# EAGLE board copro (EAGLE 8.3.1)

Size 101.6 x 114.3 mm. Coordinates in mm from the lower left corner, seen from the top.
Outline: 14,12.7 87.6,12.7 87.6,20.5 101.6,20.5 101.6,114.3 0,114.3 0,20.5 14,20.5 14,12.7
Copper layers (1*16): Top 0.035mm / dielectric 1.5mm / Bottom 0.035mm
Design rules "battery_balancer": minimum track width 6mil, minimum drill 0.35mm, track to track 0.205mm, track to pad 0.205mm, pad to pad 0.205mm, via to via 0.205mm, smd to smd 6mil, copper to edge 40mil, drill to drill 6mil, minimum pad ring 10mil, minimum via ring 8mil, stop-mask expansion 4mil, vias tented up to drill 0mil, thermal gap 10mil
Holes 3.26 mm at 3.17,111.12 98.42,111.12

## Footprints (pad centres in the part's own frame; a part is rotated, then mirrored left to right if it is on the bottom)
1X03 = drill 1.016 pad 1.88: 1 0,0; 2 2.54,0; 3 5.08,0
0603 = smd 1.1 x 1: 1 -0.85,0; 2 0.85,0
QFP50P1200X1200X160-64N = smd 1.45 x 0.3: 1 -5.75,3.75; 2 -5.75,3.25; 3 -5.75,2.75; 4 -5.75,2.25; 5 -5.75,1.75; 6 -5.75,1.25; 7 -5.75,0.75; 8 -5.75,0.25; 9 -5.75,-0.25; 10 -5.75,-0.75; 11 -5.75,-1.25; 12 -5.75,-1.75; 13 -5.75,-2.25; 14 -5.75,-2.75; 15 -5.75,-3.25; 16 -5.75,-3.75; 33 5.75,-3.75; 34 5.75,-3.25; 35 5.75,-2.75; 36 5.75,-2.25; 37 5.75,-1.75; 38 5.75,-1.25; 39 5.75,-0.75; 40 5.75,-0.25; 41 5.75,0.25; 42 5.75,0.75; 43 5.75,1.25; 44 5.75,1.75; 45 5.75,2.25; 46 5.75,2.75; 47 5.75,3.25; 48 5.75,3.75 | smd 0.3 x 1.45: 17 -3.75,-5.75; 18 -3.25,-5.75; 19 -2.75,-5.75; 20 -2.25,-5.75; 21 -1.75,-5.75; 22 -1.25,-5.75; 23 -0.75,-5.75; 24 -0.25,-5.75; 25 0.25,-5.75; 26 0.75,-5.75; 27 1.25,-5.75; 28 1.75,-5.75; 29 2.25,-5.75; 30 2.75,-5.75; 31 3.25,-5.75; 32 3.75,-5.75; 49 3.75,5.75; 50 3.25,5.75; 51 2.75,5.75; 52 2.25,5.75; 53 1.75,5.75; 54 1.25,5.75; 55 0.75,5.75; 56 0.25,5.75; 57 -0.25,5.75; 58 -0.75,5.75; 59 -1.25,5.75; 60 -1.75,5.75; 61 -2.25,5.75; 62 -2.75,5.75; 63 -3.25,5.75; 64 -3.75,5.75
USB-MINIB = smd 2.5 x 0.5: D+ 2.5,0; D- 2.5,0.8; GND 2.5,-1.6; ID 2.5,-0.8; VBUS 2.5,1.6 | smd 2.5 x 2: S1 -3,4.5; S2 2.5,4.5; S3 -3,-4.5; S4 2.5,-4.5 | hole 0.9: 0,2.2; 0,-2.2
CUI_PJ-002AH-SMT-TR = smd 1.5 x 2.4: 1.1 -3.05,5.7; 1.2 3.05,5.7; 2 -3.05,-5.7; 3 3.05,-5.7 | hole 1.6: -3.05,0 | hole 1.8: 1.45,0
SHDR20W81P254_2X10_3300X840X93 = drill 1 pad 1.5 square: 1 0,0 | drill 1 pad 1.5: 2 0,2.54; 3 2.54,0; 4 2.54,2.54; 5 5.08,0; 6 5.08,2.54; 7 7.62,0; 8 7.62,2.54; 9 10.16,0; 10 10.16,2.54; 11 12.7,0; 12 12.7,2.54; 13 15.24,0; 14 15.24,2.54; 15 17.78,0; 16 17.78,2.54; 17 20.32,0; 18 20.32,2.54; 19 22.86,0; 20 22.86,2.54
DIL04 = drill 0.813 offset: 1 -1.27,-3.81; 2 1.27,-3.81; 3 1.27,3.81; 4 -1.27,3.81
MOLEX_503500-0991 = smd 1.2 x 1.95: 1 -6.249,0; 2 -3.749,0; 3 -1.249,0; 4 1.251,0; 5 3.751,0; 6 6.251,0; 7 7.751,0; 8 9.251,0; 9 -8.749,0 | smd 1.5 x 1.1: DS1 14.094,-7.208 | smd 1.6 x 1.87: DS2 8.223,-15.258 | smd 2.1 x 1.55: PAD1 -11.274,11.176; PAD2 12.525,11.177 | smd 2.1 x 3.2: PAD3 -11.275,8.301; PAD4 12.525,8.301 | smd 1.55 x 2.2: PAD5 -13.729,3.625 | smd 1.55 x 4.17: PAD6 -13.68,-14.113 | smd 1.5 x 1.65: PAD7 14.094,-15.373 | smd 1 x 2: WP1 12.246,4.165; WP2 13.346,4.165
39-30-?02? = drill 1.422 pad 2.54 square: 1 0,0 | drill 1.422 pad 2.54 octagon: 2 0,5.512 | hole 3: 0,-7.3
TO18 = drill 0.813 octagon: 1 -1.27,-1.27; 2 1.27,-1.27; 3 1.27,1.27
5530843-6-BOARDFINGERS = smd 1.651 x 6.35 bottom: 3.3V_4 0.826,3.175; 3.3V_5 3.365,3.175; 3.3V_6 5.905,3.175; EXTRA1 16.066,3.175; EXTRA2 18.605,3.175; EXTRA3 21.145,3.175; EXTRA4 23.686,3.175; EXTRA5 26.226,3.175; EXTRA6 28.765,3.175; EXTRA7 31.305,3.175; EXTRA8 33.846,3.175; EXTRA9 36.386,3.175; EXTRA10 38.925,3.175; EXTRA11 41.465,3.175; EXTRA12 44.005,3.175; EXTRA13 46.545,3.175; EXTRA14 49.086,3.175; EXTRA15 51.626,3.175; EXTRA16 54.166,3.175; EXTRA17 56.706,3.175; EXTRA18 59.245,3.175; EXTRA19 61.785,3.175; EXTRA20 64.326,3.175; EXTRA21 66.865,3.175; EXTRA22 69.406,3.175; GND_4 8.445,3.175; GND_5 10.986,3.175; GND_6 13.525,3.175 | smd 1.651 x 6.35: 3.3VP1 0.826,3.175; 3.3VP2 3.365,3.175; 3.3VP3 5.905,3.175; CAN_H 51.626,3.175; CAN_L 54.166,3.175; EXTRA23 16.066,3.175; EXTRA24 18.605,3.175; EXTRA25 21.145,3.175; EXTRA26 23.686,3.175; EXTRA27 26.226,3.175; EXTRA28 28.765,3.175; EXTRA29 31.305,3.175; EXTRA30 33.846,3.175; EXTRA31 36.386,3.175; EXTRA32 38.925,3.175; EXTRA33 41.465,3.175; EXTRA34 44.005,3.175; EXTRA35 46.545,3.175; GND1 8.445,3.175; GND2 10.986,3.175; GND3 13.525,3.175; KILL_SWITCH 49.086,3.175; SCL_DEPTH 59.245,3.175; SCL_ESC 69.406,3.175; SCL_SENSOR 64.326,3.175; SDA_DEPTH 56.706,3.175; SDA_ESC 66.865,3.175; SDA_SENSOR 61.785,3.175
DF13-4P-1.25DSA = drill 0.6 pad 1.016 square: P$1 1.875,0 | drill 0.6 pad 1.016: P$2 0.625,0; P$3 -0.625,0; P$4 -1.875,0

## Placement (x,y rotation side)
455-1750-1-ND  [1X03]  -92.08,-26.99 0 top  (outside the outline)
455-1750-1-ND1  [1X03]  -92.08,-277.81 0 top  (outside the outline)
455-1750-1-ND2  [1X03]  -92.08,-339.73 0 top  (outside the outline)
455-1750-1-ND3  [1X03]  -92.08,-401.64 0 top  (outside the outline)
455-1750-1-ND4  [1X03]  -92.08,-463.55 0 top  (outside the outline)
455-1750-1-ND5  [1X03]  -92.08,-525.46 0 top  (outside the outline)
455-1750-1-ND6  [1X03]  -92.08,-587.38 0 top  (outside the outline)
455-1750-1-ND7  [1X03]  -92.08,-649.29 0 top  (outside the outline)
455-1750-1-ND8  [1X03]  -92.08,-711.2 0 top  (outside the outline)
455-1750-1-ND9  [1X03]  -92.08,-773.11 0 top  (outside the outline)
C1  4.7uF  [0603]  -98.42,-176.21 0 top  (outside the outline)
C2  100nF  [0603]  -98.42,-157.16 0 top  (outside the outline)
C3  2.2uF  [0603]  -98.42,-138.11 0 top  (outside the outline)
C4  100nF  [0603]  -98.42,-142.88 0 top  (outside the outline)
C6  100nF  [0603]  -98.42,-76.2 0 top  (outside the outline)
C8  2.2uF  [0603]  -98.42,-104.77 0 top  (outside the outline)
C9  100nF  [0603]  -98.42,-109.54 0 top  (outside the outline)
C12  100nF  [0603]  -98.42,-171.45 0 top  (outside the outline)
C14  1uF  [0603]  -98.42,-133.35 0 top  (outside the outline)
IC1  STM32F405RGT6  [QFP50P1200X1200X160-64N]  -93.66,-47.62 0 top  (outside the outline)
J1  USB_MINI-B_SMT  [USB-MINIB]  -7.94,3.17 0 top  (outside the outline)
J2  PJ-002AH-SMT-TR  [CUI_PJ-002AH-SMT-TR]  -19.05,-4.76 0 top  (outside the outline)
J4  30320-6002HB  [SHDR20W81P254_2X10_3300X840X93]  60.33,46.04 0 top
OK1  SFH610  [DIL04]  -33.34,-4.76 0 top  (outside the outline)
OK2  SFH610  [DIL04]  -93.66,-257.18 0 top  (outside the outline)
OK3  SFH610  [DIL04]  -93.66,-319.09 0 top  (outside the outline)
OK4  SFH610  [DIL04]  -93.66,-381 0 top  (outside the outline)
OK5  SFH610  [DIL04]  -93.66,-442.91 0 top  (outside the outline)
OK6  SFH610  [DIL04]  -93.66,-504.82 0 top  (outside the outline)
OK7  SFH610  [DIL04]  -93.66,-566.74 0 top  (outside the outline)
OK8  SFH610  [DIL04]  -93.66,-628.65 0 top  (outside the outline)
OK9  SFH610  [DIL04]  -93.66,-690.56 0 top  (outside the outline)
OK10  SFH610  [DIL04]  -93.66,-752.47 0 top  (outside the outline)
P1  503500-0991  [MOLEX_503500-0991]  -58.74,4.76 0 top  (outside the outline)
P2  39-30-02?  [39-30-?02?]  -88.9,-1.59 0 top  (outside the outline)
R1  10k  [0603]  -80.96,-288.93 0 top  (outside the outline)
R2  10k  [0603]  -98.42,-244.48 0 top  (outside the outline)
R3  10k  [0603]  -98.42,-195.26 0 top  (outside the outline)
R4  1k  [0603]  -98.42,-214.31 0 top  (outside the outline)
R5  220  [0603]  -98.42,-239.71 0 top  (outside the outline)
R6  1k  [0603]  -74.61,-288.93 0 top  (outside the outline)
R7  220  [0603]  -98.42,-306.39 0 top  (outside the outline)
R8  10k  [0603]  -92.08,-306.39 0 top  (outside the outline)
R9  10k  [0603]  -80.96,-350.84 0 top  (outside the outline)
R10  1k  [0603]  -74.61,-350.84 0 top  (outside the outline)
R11  220  [0603]  -98.42,-368.3 0 top  (outside the outline)
R12  10k  [0603]  -92.08,-368.3 0 top  (outside the outline)
R13  10k  [0603]  -80.96,-412.75 0 top  (outside the outline)
R14  1k  [0603]  -74.61,-412.75 0 top  (outside the outline)
R15  220  [0603]  -98.42,-430.21 0 top  (outside the outline)
R16  10k  [0603]  -92.08,-430.21 0 top  (outside the outline)
R17  10k  [0603]  -80.96,-474.66 0 top  (outside the outline)
R18  1k  [0603]  -74.61,-474.66 0 top  (outside the outline)
R19  220  [0603]  -98.42,-492.12 0 top  (outside the outline)
R20  10k  [0603]  -92.08,-492.12 0 top  (outside the outline)
R21  10k  [0603]  -80.96,-536.57 0 top  (outside the outline)
R22  1k  [0603]  -74.61,-536.57 0 top  (outside the outline)
R23  220  [0603]  -98.42,-554.04 0 top  (outside the outline)
R24  10k  [0603]  -92.08,-554.04 0 top  (outside the outline)
R25  10k  [0603]  -80.96,-598.49 0 top  (outside the outline)
R26  1k  [0603]  -74.61,-598.49 0 top  (outside the outline)
R27  220  [0603]  -98.42,-615.95 0 top  (outside the outline)
R28  10k  [0603]  -92.08,-615.95 0 top  (outside the outline)
R29  10k  [0603]  -80.96,-660.4 0 top  (outside the outline)
R30  1k  [0603]  -74.61,-660.4 0 top  (outside the outline)
R31  220  [0603]  -98.42,-677.86 0 top  (outside the outline)
R32  10k  [0603]  -92.08,-677.86 0 top  (outside the outline)
R33  10k  [0603]  -80.96,-722.31 0 top  (outside the outline)
R34  1k  [0603]  -74.61,-722.31 0 top  (outside the outline)
R35  220  [0603]  -98.42,-739.77 0 top  (outside the outline)
R36  10k  [0603]  -92.08,-739.77 0 top  (outside the outline)
R37  10k  [0603]  -80.96,-784.22 0 top  (outside the outline)
R38  1k  [0603]  -74.61,-784.22 0 top  (outside the outline)
R39  220  [0603]  -98.42,-801.69 0 top  (outside the outline)
R40  10k  [0603]  -92.08,-801.69 0 top  (outside the outline)
T1  2N2222  [TO18]  -93.66,-223.84 0 top  (outside the outline)
T2  2N2222  [TO18]  -93.66,-295.28 0 top  (outside the outline)
T3  2N2222  [TO18]  -93.66,-357.19 0 top  (outside the outline)
T4  2N2222  [TO18]  -93.66,-419.1 0 top  (outside the outline)
T5  2N2222  [TO18]  -93.66,-481.01 0 top  (outside the outline)
T6  2N2222  [TO18]  -93.66,-542.92 0 top  (outside the outline)
T7  2N2222  [TO18]  -93.66,-604.84 0 top  (outside the outline)
T8  2N2222  [TO18]  -93.66,-666.75 0 top  (outside the outline)
T9  2N2222  [TO18]  -93.66,-728.66 0 top  (outside the outline)
T10  2N2222  [TO18]  -93.66,-790.57 0 top  (outside the outline)
U$1  5530843  [5530843-6-BOARDFINGERS]  3.17,0 0 top
U$3  DF13-4P-1.25DSA  [DF13-4P-1.25DSA]  -6.35,-11.11 0 top  (outside the outline)

## Library data of the parts
455-1750-1-ND 455-1750-1-ND1-455-1750-1-ND9 = SparkFun-Connectors; PROD_ID: XXX-00000
C1-C4 C6 C8 C9 C12 C14 = SparkFun-Capacitors; PROD_ID: CAP-08390
IC1 = STM32F405RGT6; ALLIED_NUMBER: 70391099; DESCRIPTION: MCU 32-Bit, ARM Cortex M4, 1MB Flash STMicroelectronics STM32F405RGT6, 32bit ARM Cortex M4F Microcontroller, 168MHz, 1024 kB Flash, 64-Pin LQFP; HEIGHT: 1.6mm; MANUFACTURER_NAME: STMicroelectronics; MANUFACTURER_PART_NUMBER: STM32F405RGT6; RS_PART_NUMBER: 7468217; SUPPLIER_NAME: RS
J1 = SparkFun-Connectors; PROD_ID: CONN-08193; SF_ID: PRT-00587
J2 = PJ-002AH-SMT-TR; AVAILABILITY: Good; DESCRIPTION: 24 VDC 5 A Surface Mount Unshielded 2 Conductors 3 Contacts Male Power Jack; MF: CUI; MP: PJ-002AH-SMT-TR; PACKAGE: None; PRICE: 0.98 USD
J4 = 30320-6002HB; DESCRIPTION: Header 20 position 3M 303 Series, 2.54mm Pitch 20 Way 2 Row Shrouded Straight PCB Header, Through Hole, Solder Termination; HEIGHT: 9.3mm; MANUFACTURER_NAME: 3M; MANUFACTURER_PART_NUMBER: 30320-6002HB; RS_PART_NUMBER: 8273587; SUPPLIER_NAME: RS
OK1-OK10 = optocoupler; MF: VISHAY/TELEFUNKEN; MPN: SFH6106-4; OC_FARNELL: 1469568; OC_NEWARK: 58K2193
P1 = 503500-0991; AVAILABILITY: Good; DESCRIPTION: Conn SD Card SKT 9 POS 2.5mm Solder RA SMD Embossed T/R 0.5A/Contact; MF: Molex; MP: 503500-0991; PACKAGE: FakePackage u; PRICE: 3.04 USD
P2 = con-molex-mini-fit
R1-R40 = SparkFun-Resistors; PROD_ID: RES-07856
T1-T10 = transistor
U$1 = 5530843-6
U$3 = con-hirose-df13

## Nets
3.3V: C1.1 C2.1 C4.1 C9.1 C12.1 IC1.19 IC1.32 IC1.48 IC1.64 U$1.3.3VP1 U$1.3.3VP2 U$1.3.3VP3
+3V3: C6.2 C14.2 IC1.1 IC1.13 J1.VBUS J4.1 J4.2
GND: C1.2 C2.2 C3.2 C4.2 C6.1 C8.2 C9.2 C12.2 C14.1 IC1.12 IC1.18 IC1.63 J1.GND J1.S1 J1.S2 J1.S3 J1.S4 J4.4 J4.6 J4.8 J4.10 J4.12 J4.14 J4.16 J4.18 J4.20 OK1.2 OK2.2 OK3.2 OK4.2 OK5.2 OK6.2 OK7.2 OK8.2 OK9.2 OK10.2 U$1.GND1 U$1.GND2 U$1.GND3 U$1.GND_4 U$1.GND_5 U$1.GND_6
N$1: OK2.3 R1.1 R6.2
N$2: R4.1 T1.2
N$3: C3.1 C8.1 IC1.31 IC1.47
N$4: OK1.1 R5.2
N$5: 455-1750-1-ND.1 R2.1 T1.3
N$6: OK1.3 R3.1 R4.2
N$7: 455-1750-1-ND.3 OK1.4 T1.1
N$8: 455-1750-1-ND.2 R2.2 R3.2
N$9: R6.1 T2.2
N$10: 455-1750-1-ND1.3 OK2.4 T2.1
N$11: OK2.1 R7.2
N$12: 455-1750-1-ND1.1 R8.1 T2.3
N$13: IC1.14 R5.1
N$14: IC1.15 R7.1
N$15: 455-1750-1-ND1.2 R1.2 R8.2
N$16: OK3.3 R9.1 R10.2
N$17: R10.1 T3.2
N$18: 455-1750-1-ND2.3 OK3.4 T3.1
N$19: OK3.1 R11.2
N$20: 455-1750-1-ND2.1 R12.1 T3.3
N$21: IC1.16 R11.1
N$22: 455-1750-1-ND2.2 R9.2 R12.2
N$23: OK4.3 R13.1 R14.2
N$24: R14.1 T4.2
N$25: 455-1750-1-ND3.3 OK4.4 T4.1
N$26: OK4.1 R15.2
N$27: 455-1750-1-ND3.1 R16.1 T4.3
N$28: IC1.17 R15.1
N$29: 455-1750-1-ND3.2 R13.2 R16.2
N$30: OK5.3 R17.1 R18.2
N$31: R18.1 T5.2
N$32: 455-1750-1-ND4.3 OK5.4 T5.1
N$33: OK5.1 R19.2
N$34: 455-1750-1-ND4.1 R20.1 T5.3
N$35: IC1.22 R19.1
N$36: 455-1750-1-ND4.2 R17.2 R20.2
N$37: OK6.3 R21.1 R22.2
N$38: R22.1 T6.2
N$39: 455-1750-1-ND5.3 OK6.4 T6.1
N$40: OK6.1 R23.2
N$41: 455-1750-1-ND5.1 R24.1 T6.3
N$42: IC1.23 R23.1
N$43: 455-1750-1-ND5.2 R21.2 R24.2
N$44: OK7.3 R25.1 R26.2
N$45: R26.1 T7.2
N$46: 455-1750-1-ND6.3 OK7.4 T7.1
N$47: OK7.1 R27.2
N$48: 455-1750-1-ND6.1 R28.1 T7.3
N$49: IC1.26 R27.1
N$50: 455-1750-1-ND6.2 R25.2 R28.2
N$51: OK8.3 R29.1 R30.2
N$52: R30.1 T8.2
N$53: 455-1750-1-ND7.3 OK8.4 T8.1
N$54: OK8.1 R31.2
N$55: 455-1750-1-ND7.1 R32.1 T8.3
N$56: IC1.27 R31.1
N$57: 455-1750-1-ND7.2 R29.2 R32.2
N$58: OK9.3 R33.1 R34.2
N$59: R34.1 T9.2
N$60: 455-1750-1-ND8.3 OK9.4 T9.1
N$61: OK9.1 R35.2
N$62: 455-1750-1-ND8.1 R36.1 T9.3
N$63: IC1.29 R35.1
N$64: 455-1750-1-ND8.2 R33.2 R36.2
N$65: OK10.3 R37.1 R38.2
N$66: R38.1 T10.2
N$67: 455-1750-1-ND9.3 OK10.4 T10.1
N$68: OK10.1 R39.2
N$69: 455-1750-1-ND9.1 R40.1 T10.3
N$70: IC1.30 R39.1
N$71: 455-1750-1-ND9.2 R37.2 R40.2
N$72: IC1.35 J1.D-
N$73: IC1.36 J1.D+
N$74: IC1.7 J4.15
N$75: IC1.55 J4.13
N$76: IC1.49 J4.9
N$77: IC1.50 J4.7
N$78: IC1.46 J4.5
N$79: IC1.56 J4.3
POWER: U$1.3.3V_4 U$1.3.3V_5 U$1.3.3V_6

## Tracks (layer width: path | path; a pad name or v marks a point on that pad's centre or on a via)
3.3V  (11 unrouted)
+3V3  (6 unrouted)
GND  (41 unrouted)
N$1  (2 unrouted)
N$2  (1 unrouted)
N$3  (3 unrouted)
N$4  (1 unrouted)
N$5  (2 unrouted)
N$6  (2 unrouted)
N$7  (2 unrouted)
N$8  (2 unrouted)
N$9  (1 unrouted)
N$10  (2 unrouted)
N$11  (1 unrouted)
N$12  (2 unrouted)
N$13  (1 unrouted)
N$14  (1 unrouted)
N$15  (2 unrouted)
N$16  (2 unrouted)
N$17  (1 unrouted)
N$18  (2 unrouted)
N$19  (1 unrouted)
N$20  (2 unrouted)
N$21  (1 unrouted)
N$22  (2 unrouted)
N$23  (2 unrouted)
N$24  (1 unrouted)
N$25  (2 unrouted)
N$26  (1 unrouted)
N$27  (2 unrouted)
N$28  (1 unrouted)
N$29  (2 unrouted)
N$30  (2 unrouted)
N$31  (1 unrouted)
N$32  (2 unrouted)
N$33  (1 unrouted)
N$34  (2 unrouted)
N$35  (1 unrouted)
N$36  (2 unrouted)
N$37  (2 unrouted)
N$38  (1 unrouted)
N$39  (2 unrouted)
N$40  (1 unrouted)
N$41  (2 unrouted)
N$42  (1 unrouted)
N$43  (2 unrouted)
N$44  (2 unrouted)
N$45  (1 unrouted)
N$46  (2 unrouted)
N$47  (1 unrouted)
N$48  (2 unrouted)
N$49  (1 unrouted)
N$50  (2 unrouted)
N$51  (2 unrouted)
N$52  (1 unrouted)
N$53  (2 unrouted)
N$54  (1 unrouted)
N$55  (2 unrouted)
N$56  (1 unrouted)
N$57  (2 unrouted)
N$58  (2 unrouted)
N$59  (1 unrouted)
N$60  (2 unrouted)
N$61  (1 unrouted)
N$62  (2 unrouted)
N$63  (1 unrouted)
N$64  (2 unrouted)
N$65  (2 unrouted)
N$66  (1 unrouted)
N$67  (2 unrouted)
N$68  (1 unrouted)
N$69  (2 unrouted)
N$70  (1 unrouted)
N$71  (2 unrouted)
N$72  (1 unrouted)
N$73  (1 unrouted)
N$74  (1 unrouted)
N$75  (1 unrouted)
N$76  (1 unrouted)
N$77  (1 unrouted)
N$78  (1 unrouted)
N$79  (1 unrouted)
POWER  (2 unrouted)

## Text on the board
tPlace: The Ohio State Univerity / Center for Automotive Research
Reference: The Underwater Robotics Team / Riptide -- Board Template